# EAGLE board pcb_full_1 (EAGLE 9.6.2)
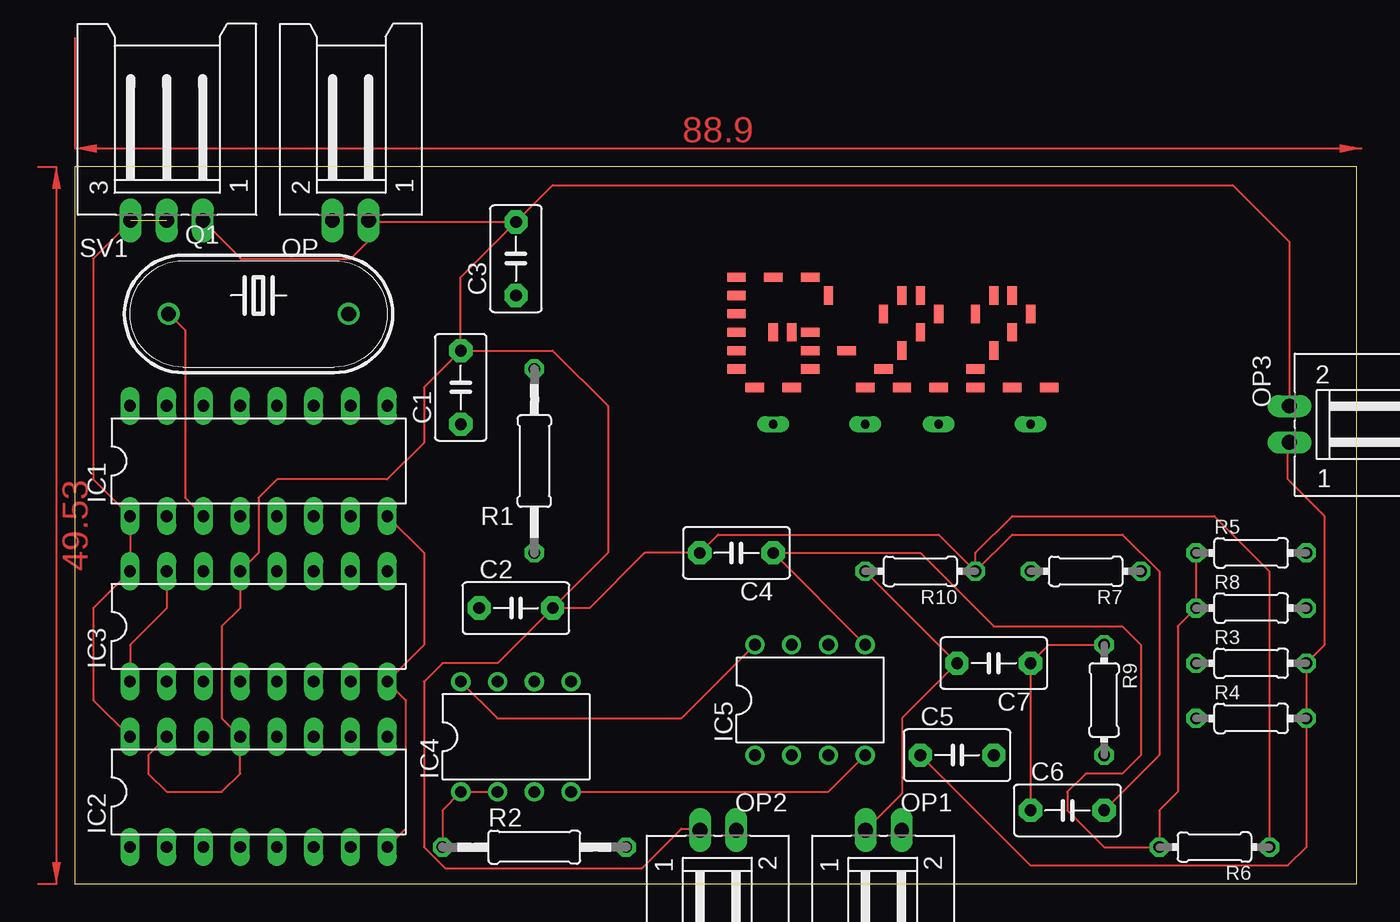
[diagram p0: board, top side]
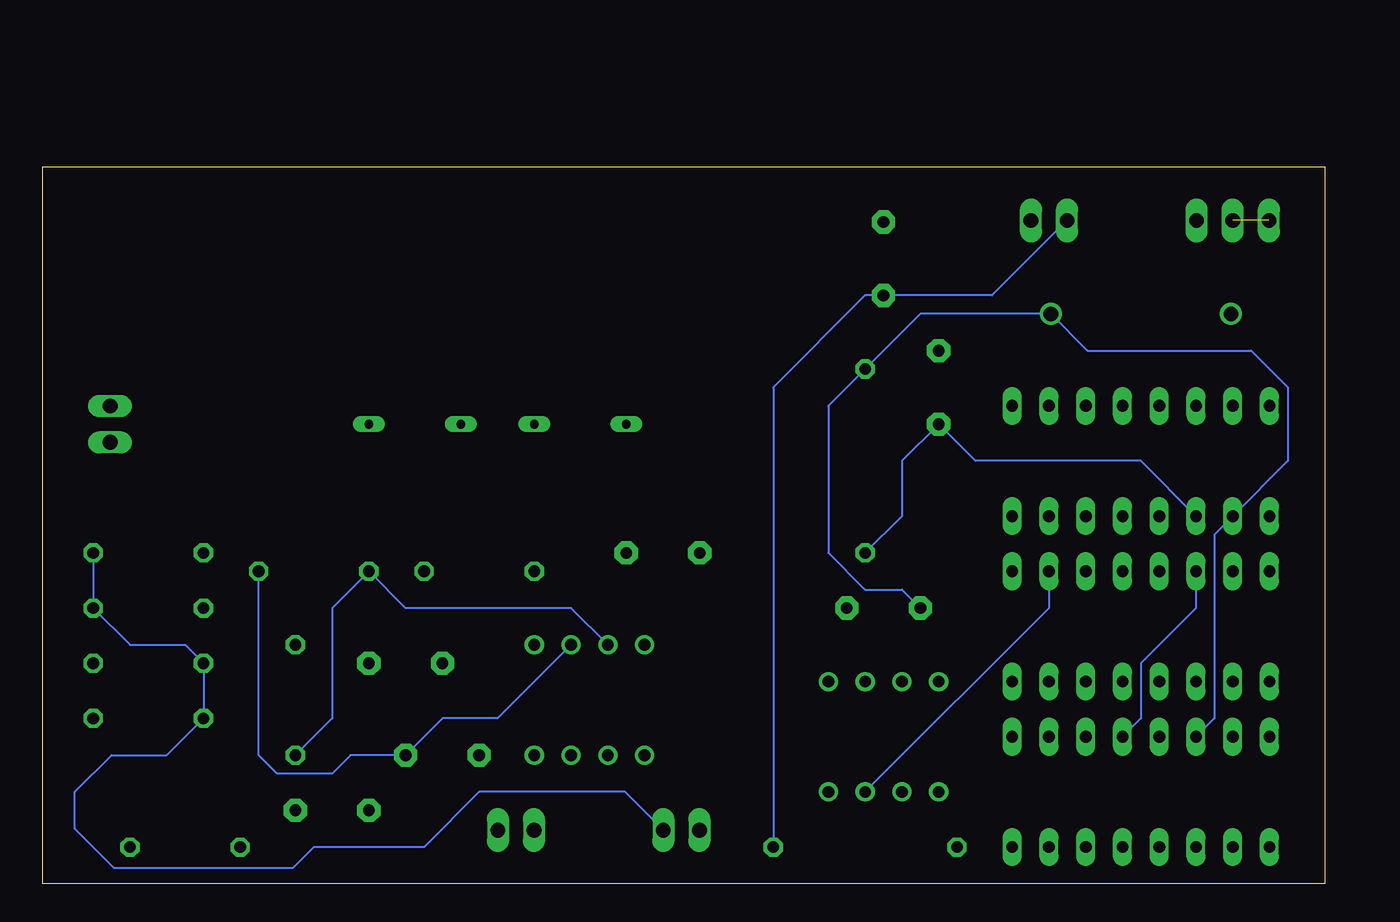
[diagram p1: board, bottom side, seen from below]

Size 88.57 x 49.52 mm. Coordinates in mm from the lower left corner, seen from the top.
Outline: 0,0 88.57,0 88.57,49.52 0,49.52 0,0
Copper layers (1*16): Top 0.035mm / dielectric 1.5mm / Bottom 0.035mm
Design rules "default *": minimum track width 6mil, minimum drill 0.6mm, track to track 6mil, track to pad 6mil, pad to pad 6mil, via to via 6mil, smd to smd 6mil, copper to edge 40mil, drill to drill 6mil, minimum pad ring 10mil, minimum via ring 8mil, stop-mask expansion 4mil, vias tented up to drill 0mil, thermal gap 10mil

## Footprints (pad centres in the part's own frame; a part is rotated, then mirrored left to right if it is on the bottom)
C5B3.5 = drill 0.813 pad 1.6 octagon: 1 -2.54,0; 2 2.54,0
DIL16 = drill 0.813 long: 1 -8.89,-3.81; 2 -6.35,-3.81; 3 -3.81,-3.81; 4 -1.27,-3.81; 5 1.27,-3.81; 6 3.81,-3.81; 7 6.35,-3.81; 8 8.89,-3.81; 9 8.89,3.81; 10 6.35,3.81; 11 3.81,3.81; 12 1.27,3.81; 13 -1.27,3.81; 14 -3.81,3.81; 15 -6.35,3.81; 16 -8.89,3.81
DIL08 = drill 0.813 pad 1.27: 1 -3.81,-3.81; 2 -1.27,-3.81; 3 1.27,-3.81; 4 3.81,-3.81; 5 3.81,3.81; 6 1.27,3.81; 7 -1.27,3.81; 8 -3.81,3.81
L02P = drill 1.016 long: 1 1.25,-6.25; 2 -1.25,-6.25
HC33U-V = drill 1.016: 1 -6.223,0; 2 6.223,0
0207/12 = drill 0.813 octagon: 1 -6.35,0; 2 6.35,0
0204/7 = drill 0.813 octagon: 1 -3.81,0; 2 3.81,0
L03P = drill 1.016 long: 1 2.5,-6.25; 2 0,-6.25; 3 -2.5,-6.25
GROUP = drill 0.6 long: 1 -7.62,-2.54; 2 -1.27,-2.54; 3 3.81,-2.54; 4 10.16,-2.54 | smd 1.27 x 0.635: P$1 -5.08,1.27; P$2 -10.16,6.35; P$3 -10.16,5.08; P$4 -10.16,3.81; P$5 -10.16,2.54; P$6 -10.16,1.27; P$7 -8.89,0; P$8 -6.35,0; P$9 -10.16,7.62; P$11 -5.08,2.54; P$12 -5.08,3.81; P$13 -7.62,7.62; P$14 -2.54,2.54; P$17 -5.08,7.62; P$22 0,1.27; P$23 -1.27,0; P$24 1.27,0; P$25 3.81,0; P$33 6.35,1.27; P$34 8.89,0; P$35 11.43,0; P$36 6.35,0 | smd 0.635 x 1.27: P$10 -7.62,3.81; P$15 2.54,6.35; P$16 1.27,6.35; P$18 -6.35,3.81; P$19 3.81,5.08; P$20 2.54,3.81; P$21 1.27,2.54; P$26 0,5.08; P$27 -3.81,6.35; P$28 8.89,6.35; P$29 7.62,6.35; P$30 10.16,5.08; P$31 8.89,3.81; P$32 7.62,2.54; P$37 6.35,5.08

## Placement (x,y rotation side)
C1  [C5B3.5]  26.67,34.29 90 top
C2  [C5B3.5]  30.48,19.05 0 top
C3  [C5B3.5]  30.48,43.18 90 top
C4  [C5B3.5]  45.72,22.86 180 top
C5  [C5B3.5]  60.96,8.89 0 top
C6  [C5B3.5]  68.58,5.08 0 top
C7  [C5B3.5]  63.5,15.24 180 top
IC1  4049N  [DIL16]  12.7,29.21 0 top
IC2  4017N  [DIL16]  12.7,6.35 0 top
IC3  4017N  [DIL16]  12.7,17.78 0 top
IC4  TL072P  [DIL08]  30.48,10.16 0 top
IC5  TL072P  [DIL08]  50.8,12.7 0 top
OP  [L02P]  19.05,52.07 0 top
OP1  [L02P]  55.88,-2.54 180 top
OP2  [L02P]  44.45,-2.54 180 top
OP3  [L02P]  90.17,31.75 270 top
Q1  [HC33U-V]  12.7,39.37 0 top
R1  [0207/12]  31.75,29.21 90 top
R2  [0207/12]  31.75,2.54 0 top
R3  [0204/7]  81.28,15.24 0 top
R4  [0204/7]  81.28,11.43 0 top
R5  [0204/7]  81.28,22.86 0 top
R6  [0204/7]  78.74,2.54 180 top
R7  [0204/7]  69.85,21.59 180 top
R8  [0204/7]  81.28,19.05 0 top
R9  [0204/7]  71.12,12.7 270 top
R10  [0204/7]  58.42,21.59 180 top
SV1  [L03P]  6.35,52.07 0 top
U$1  GROUP  [GROUP]  55.88,34.29 0 top

## Library data of the parts
C1-C7 = capacitor-wima
IC1-IC3 = 40xx
IC4 IC5 = linear
OP OP1-OP3 SV1 = con-amp-mt; OC_FARNELL: unknown; OC_NEWARK: unknown
Q1 = crystal; OC_FARNELL: unknown; OC_NEWARK: unknown
R1-R10 = rcl; SPICEPREFIX: R
U$1 = Group22

## Nets
GND: C1.2 C2.2 C3.2 C4.2 C6.2 IC2.13 IC2.15 IC3.13 OP2.1 OP3.2 OP.1 R6.1 R10.1 SV1.1
GND1: C5.1 OP3.1 R3.2 R4.2
N$1: C1.1 IC1.3 Q1.1 R1.1
N$2: C2.1 IC1.2 IC2.14 Q1.2 R1.2
N$3: C3.1 OP.2 R2.2
N$4: IC3.1 IC3.15
N$5: IC3.10 IC4.3
N$6: IC4.1 IC4.2 R2.1
N$7: C4.1 IC5.5 R5.1 R6.2 R8.1
N$8: IC2.12 IC3.14
N$10: OP2.2 R3.1 R4.1 R5.2 R8.2
N$11: C5.2 IC5.6 R7.1
N$12: C7.2 OP1.1 R10.2
N$13: IC5.7 R7.2 R9.2
N$14: C6.1 C7.1 R9.1
V+: IC4.8 IC5.8
V-: IC4.4 IC5.4
VDD: IC1.1 IC2.16 IC3.16 SV1.2 SV1.3
VSS: IC1.8 IC2.8 IC3.8

## Tracks (layer width: path | path; a pad name or v marks a point on that pad's centre or on a via)
GND
  Top 0.152: C3.2 20.4,45.72 OP.1 20.3,45.72 20.3,45.7 20.3,44.43 19.05,43.18 11.43,43.18 11.43,43.24 SV1.1 | C1.2 26.67,41.91 C3.2 | C2.2 36.83,22.86 36.83,33.02 33.02,36.83 C1.2 | C1.2 24.13,34.29 24.13,30.48 21.59,27.94 13.97,27.94 12.7,26.67 12.7,22.86 IC3.13 11.43,19.05 10.16,17.78 10.16,11.43 IC2.13 11.43,7.62 10.16,6.35 6.35,6.35 5.08,7.62 5.08,8.89 IC2.15 | R10.1 64.77,24.13 72.39,24.13 74.93,21.59 74.93,8.89 C6.2 | C2.2 35.56,19.05 39.37,22.86 C4.2 44.45,24.13 59.69,24.13 R10.1 | C2.2 29.21,15.24 25.4,15.24 24.13,13.97 24.13,2.54 25.58,1.09 39.19,1.09 41.91,3.81 43.1,3.81 OP2.1 | R10.1 62.23,22.86 64.77,25.4 78.74,25.4 82.55,21.59 R6.1 | C3.2 33.02,48.26 80.01,48.26 83.92,44.35 OP3.2
GND1
  Top 0.152: C5.1 66.04,1.27 83.82,1.27 85.09,2.54 R4.2 R3.2 86.36,16.51 86.36,25.4 83.82,27.94 83.82,30.4 OP3.1
N$1
  Top 0.152: Q1.1 7.62,38.23 7.62,26.67 IC1.3
  Bottom 0.152: IC1.3 12.7,29.21 24.13,29.21 C1.1 29.21,29.21 29.21,25.4 R1.1
N$2
  Bottom 0.152: IC2.14 7.62,11.43 7.62,24.13 IC1.2 2.54,29.21 2.54,34.29 5.08,36.83 16.38,36.83 Q1.2 27.94,39.37 R1.2 34.29,33.02 34.29,22.86 31.75,20.32 29.21,20.32 C2.1
N$3
  Bottom 0.152: OP.2 22.98,40.64 C3.1 31.75,40.64 38.1,34.29 R2.2
N$4
  Top 0.152: IC3.15 6.35,19.05 3.81,16.51 IC3.1
N$5
  Bottom 0.152: IC3.10 19.05,19.05 IC4.3
N$6
  Top 0.152: R2.1 25.4,5.08 IC4.1 IC4.2
N$7
  Top 0.152: R5.1 R8.1 76.2,17.78 76.2,6.35 74.93,5.08 R6.2 71.12,2.54 68.58,5.08 68.58,6.35 69.85,7.62 72.39,7.62 73.66,8.89 73.66,16.51 72.39,17.78 63.5,17.78 58.42,22.86 C4.1 IC5.5
N$8
  Bottom 0.152: IC3.14 8.89,19.05 12.7,15.24 12.7,11.43 IC2.12
N$10
  Bottom 0.152: OP2.2 48.34,6.35 58.42,6.35 62.23,2.54 69.85,2.54 71.3,1.09 83.64,1.09 86.36,3.81 86.36,6.35 83.82,8.89 80.01,8.89 R4.1 R3.1 78.74,16.51 82.55,16.51 R8.2 R5.2
N$11
  Bottom 0.152: IC5.6 57.15,11.43 60.96,11.43 C5.2 67.31,8.89 68.58,7.62 72.39,7.62 73.66,8.89 R7.1
N$12
  Top 0.152: R10.2 C7.2 57.15,11.43 57.15,6.23 OP1.1
N$13
  Bottom 0.152: IC5.7 52.07,19.05 63.5,19.05 R7.2 68.58,19.05 68.58,11.43 R9.2
N$14
  Top 0.152: C6.1 C7.1 67.31,16.51 R9.1
V+
  Top 0.152: IC4.8 29.21,11.43 41.91,11.43 IC5.8
V-
  Top 0.152: IC5.4 52.07,6.35 IC4.4
VDD  (1 unrouted)
  Top 0.152: SV1.3 3.85,45.76 1.27,43.18 1.27,27.94 IC1.1 IC3.16 1.27,19.05 1.27,12.7 IC2.16
VSS
  Top 0.152: IC1.8 24.13,22.86 24.13,16.51 IC3.8 22.86,12.7 22.86,3.81 IC2.8
(copper drawn outside any net)
  shapes: Top area x2